# EAGLE board FET_s (EAGLE 6.4)
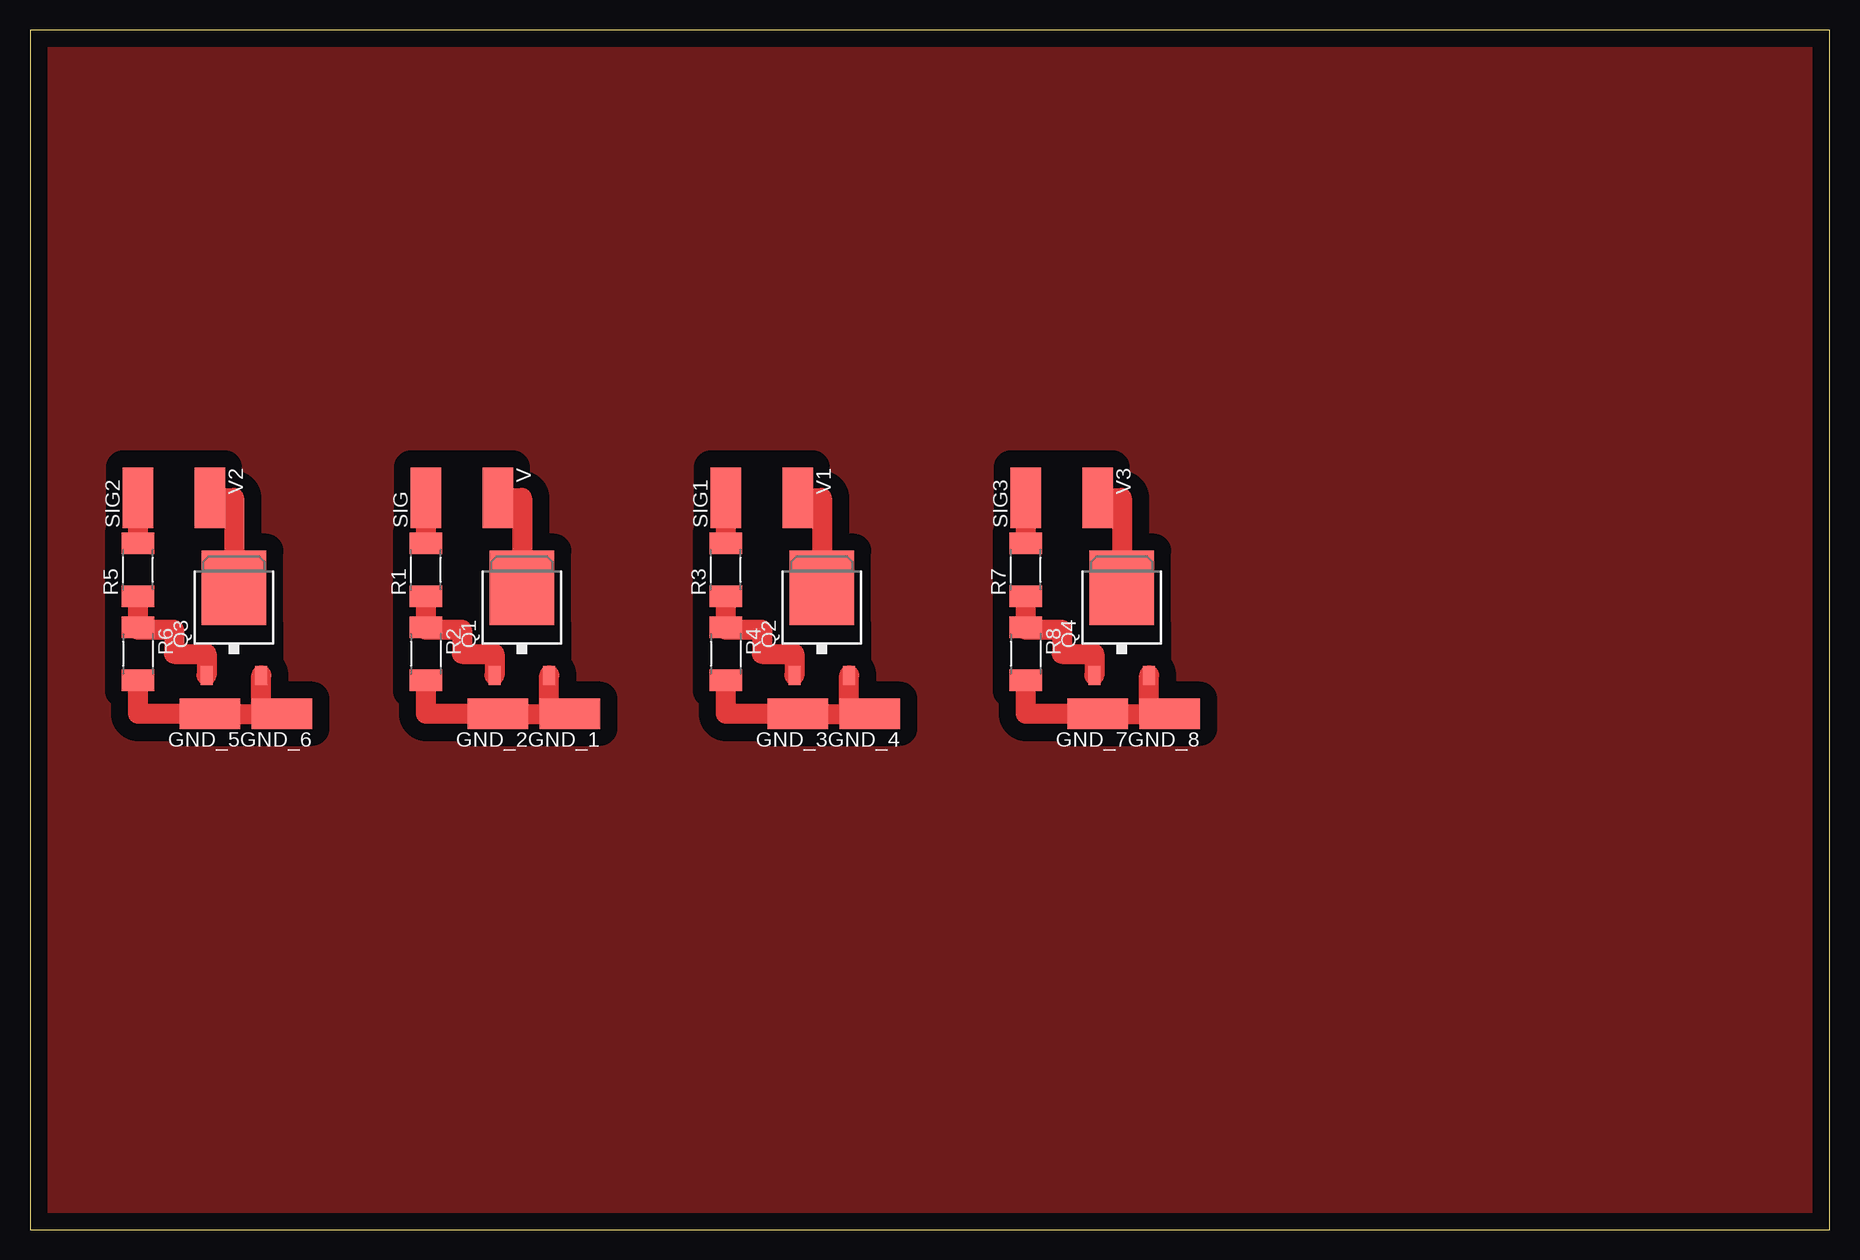
[diagram p0: board, top side]

Size 150 x 100 mm. Coordinates in mm from the lower left corner, seen from the top.
Outline: 0,0 150,0 150,100 0,100 0,0
Copper layers (1*16): Top 0.035mm / dielectric 1.5mm / Bottom 0.035mm
Design rules "default": minimum track width 10mil, minimum drill 24mil, track to track 8mil, track to pad 8mil, pad to pad 8mil, via to via 8mil, smd to smd 8mil, copper to edge 40mil, drill to drill 8mil, minimum pad ring 10mil, minimum via ring 8mil, stop-mask expansion 4mil, vias tented up to drill 0mil, thermal gap 10mil

## Footprints (pad centres in the part's own frame; a part is rotated, then mirrored left to right if it is on the bottom)
SMD2,54-5,08 = smd 2.54 x 5.08: 1 0,0
TO252 = smd 1 x 1.6: 1 -2.28,-4.8; 2 2.28,-4.8 | smd 5.4 x 6.2: 3 0,2.5
R2010 = smd 1.8 x 2.7: 1 -2.2,0; 2 2.2,0

## Placement (x,y rotation side)
GND_1  [SMD2,54-5,08]  45,43 90 top
GND_2  [SMD2,54-5,08]  39,43 90 top
GND_3  [SMD2,54-5,08]  64,43 90 top
GND_4  [SMD2,54-5,08]  70,43 90 top
GND_5  [SMD2,54-5,08]  15,43 90 top
GND_6  [SMD2,54-5,08]  21,43 90 top
GND_7  [SMD2,54-5,08]  89,43 90 top
GND_8  [SMD2,54-5,08]  95,43 90 top
Q1  FDD4141TO252  [TO252]  41,51 0 top
Q2  FDD4141TO252  [TO252]  66,51 0 top
Q3  FDD4141TO252  [TO252]  17,51 0 top
Q4  FDD4141TO252  [TO252]  91,51 0 top
R1  1k  [R2010]  33,55 90 top
R2  1k  [R2010]  33,48 270 top
R3  1k  [R2010]  58,55 90 top
R4  1k  [R2010]  58,48 270 top
R5  1k  [R2010]  9,55 90 top
R6  1k  [R2010]  9,48 270 top
R7  1k  [R2010]  83,55 90 top
R8  1k  [R2010]  83,48 270 top
SIG  [SMD2,54-5,08]  33,61 0 top
SIG1  [SMD2,54-5,08]  58,61 0 top
SIG2  [SMD2,54-5,08]  9,61 0 top
SIG3  [SMD2,54-5,08]  83,61 0 top
V  [SMD2,54-5,08]  39,61 180 top
V1  [SMD2,54-5,08]  64,61 180 top
V2  [SMD2,54-5,08]  15,61 180 top
V3  [SMD2,54-5,08]  89,61 180 top

## Library data of the parts
GND_1-GND_8 SIG SIG1-SIG3 V V1-V3 = wirepad
Q1-Q4 = transistor-fet
R1-R8 = resistor

## Nets
+5V: Q1.3 V.1
+5V1: Q2.3 V1.1
+5V2: Q3.3 V2.1
+5V3: Q4.3 V3.1
N$1: Q1.1 R1.1 R2.1
N$2: R1.2 SIG.1
N$3: Q2.1 R3.1 R4.1
N$4: R3.2 SIG1.1
N$5: Q3.1 R5.1 R6.1
N$6: R5.2 SIG2.1
N$7: Q4.1 R7.1 R8.1
N$8: R7.2 SIG3.1
S$1: GND_1.1 GND_2.1 Q1.2 R2.2
S$2: GND_3.1 GND_4.1 Q2.2 R4.2
S$3: GND_5.1 GND_6.1 Q3.2 R6.2
S$4: GND_7.1 GND_8.1 Q4.2 R8.2

## Tracks (layer width: path | path; a pad name or v marks a point on that pad's centre or on a via)
+5V
  Top 1.676: V.1 41,61 Q1.3
+5V1
  Top 1.676: V1.1 66,61 Q2.3
+5V2
  Top 1.676: V2.1 17,61 Q3.3
+5V3
  Top 1.676: V3.1 91,61 Q4.3
N$1
  Top 1.676: R1.1 R2.1 33,50 36,50 36,48 38.72,48 Q1.1
N$2
  Top 1.676: R1.2 SIG.1 33,62
N$3
  Top 1.676: R3.1 R4.1 58,50 61,50 61,48 63.72,48 Q2.1
N$4
  Top 1.676: R3.2 SIG1.1 58,62
N$5
  Top 1.676: R5.1 R6.1 9,50 12,50 12,48 14.72,48 Q3.1
N$6
  Top 1.676: R5.2 SIG2.1 9,62
N$7
  Top 1.676: R7.1 R8.1 83,50 86,50 86,48 88.72,48 Q4.1
N$8
  Top 1.676: R7.2 SIG3.1 83,62
S$1
  Top 1.676: Q1.2 43.28,43 GND_1.1 GND_2.1 | 41,43 GND_2.1 | GND_2.1 33,43 R2.2
S$2
  Top 1.676: Q2.2 68.28,43 GND_4.1 GND_3.1 | 66,43 GND_3.1 | GND_3.1 58,43 R4.2
S$3
  Top 1.676: Q3.2 19.28,43 GND_6.1 GND_5.1 | 17,43 GND_5.1 | GND_5.1 9,43 R6.2
S$4
  Top 1.676: Q4.2 93.28,43 GND_8.1 GND_7.1 | 91,43 GND_7.1 | GND_7.1 83,43 R8.2
S$5
  pour Top (isolate 1.422): 0,100 150,100 150,0 0,0